# EAGLE board Flipper WiFi Dev Board v16 (EAGLE 9.7.0)
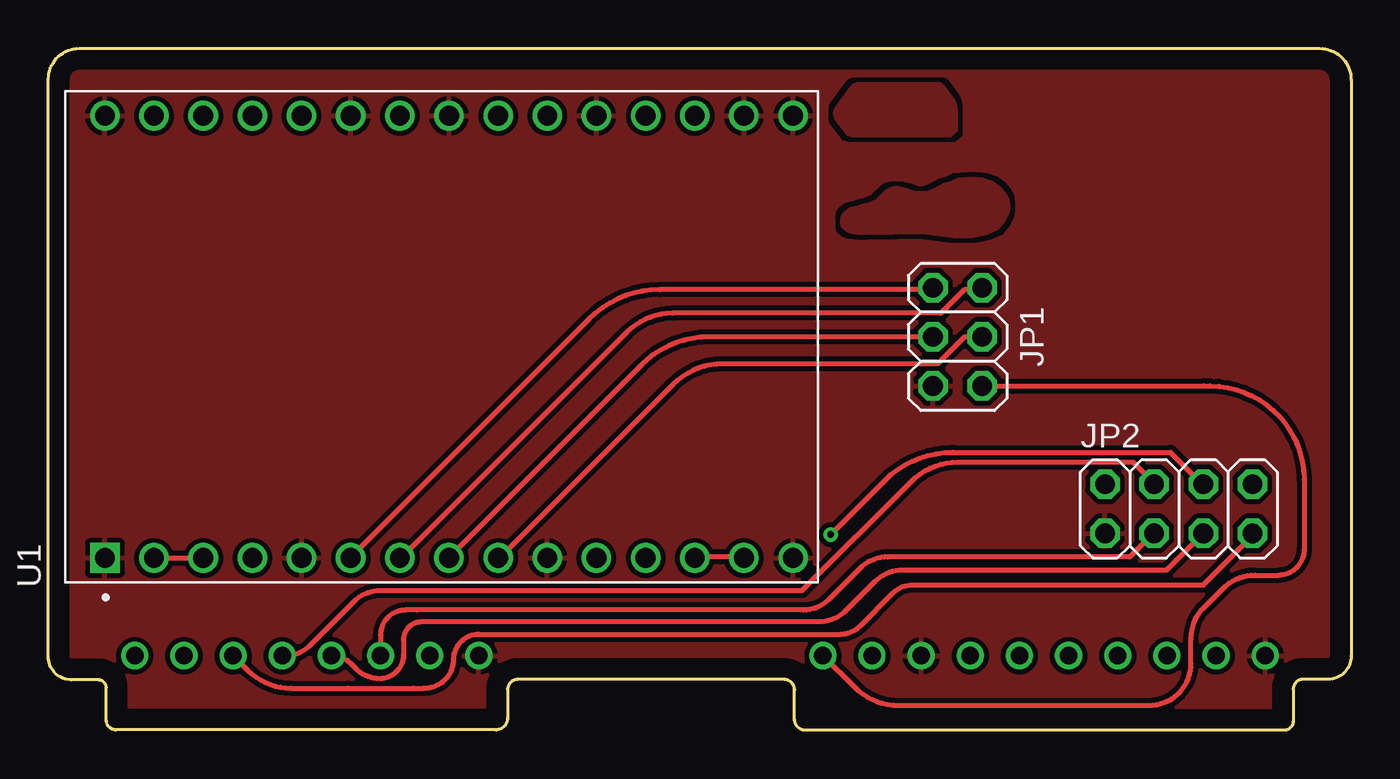
[diagram p0: board, top side]
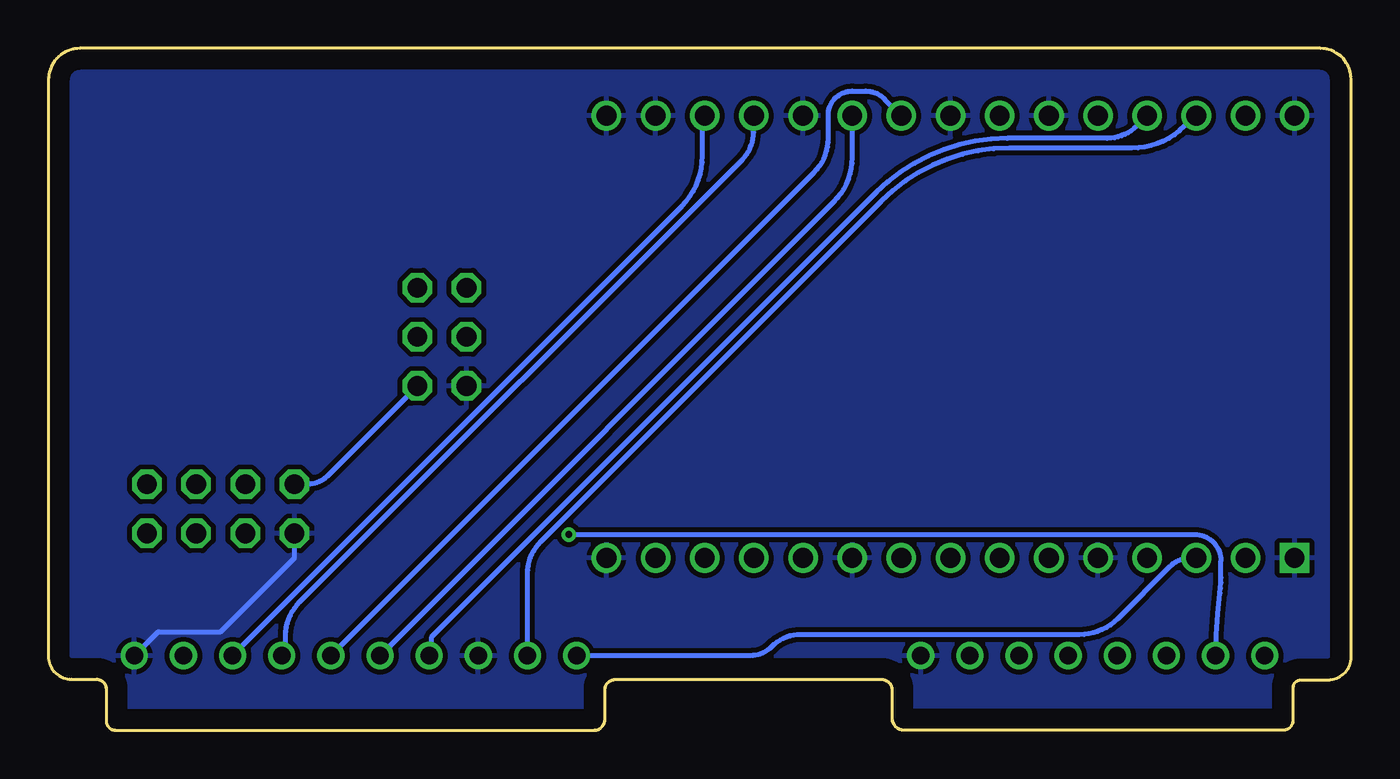
[diagram p1: board, bottom side, seen from below]

Size 67.32 x 35.25 mm. Coordinates in mm from the lower left corner, seen from the top.
Outline: 3.48,0.02 arc-90 3,0.51 3,2.19 arc90 2.58,2.61 1.19,2.61 arc-90 0,3.79 0,33.66 arc-90 1.59,35.25 65.69,35.25 arc-90 67.32,33.62 67.32,3.83 arc-90 66.13,2.64 64.84,2.64 arc90 64.33,2.13 64.33,0.48 arc-90 63.85,0 39.12,0 arc-90 38.56,0.56 38.56,2.09 arc90 38.03,2.63 24.25,2.63 arc90 23.73,2.1 23.73,0.63 arc-90 23.12,0.02 3.48,0.02
Copper layers (1*16): Top 0.035mm / dielectric 1.5mm / Bottom 0.035mm
Design rules "Fusion Electronics Design Rules": minimum track width 6mil, minimum drill 0.35mm, track to track 10mil, track to pad 10mil, pad to pad 10mil, via to via 10mil, smd to smd 10mil, copper to edge 40mil, drill to drill 6mil, minimum pad ring 10mil, minimum via ring 8mil, stop-mask expansion 4mil, vias tented up to drill 0mil, thermal gap 10mil

## Footprints (pad centres in the part's own frame; a part is rotated, then mirrored left to right if it is on the bottom)
2X03 = drill 1.016 octagon: 1 -2.54,-1.27; 2 -2.54,1.27; 3 0,-1.27; 4 0,1.27; 5 2.54,-1.27; 6 2.54,1.27
2X04 = drill 1.016 octagon: 1 -3.81,-1.27; 2 -3.81,1.27; 3 -1.27,-1.27; 4 -1.27,1.27; 5 1.27,-1.27; 6 1.27,1.27; 7 3.81,-1.27; 8 3.81,1.27
XCVR_ESP32-C3-DEVKITC-02 = drill 1.02 square: 1 -11.43,17.392 | drill 1.02: 2 -11.43,14.852; 3 -11.43,12.312; 4 -11.43,9.772; 5 -11.43,7.232; 6 -11.43,4.692; 7 -11.43,2.152; 8 -11.43,-0.388; 9 -11.43,-2.928; 10 -11.43,-5.468; 11 -11.43,-8.008; 12 -11.43,-10.548; 13 -11.43,-13.088; 14 -11.43,-15.628; 15 -11.43,-18.168; 16 11.43,-18.168; 17 11.43,-15.628; 18 11.43,-13.088; 19 11.43,-10.548; 20 11.43,-8.008; 21 11.43,-5.468; 22 11.43,-2.928; 23 11.43,-0.388; 24 11.43,2.152; 25 11.43,4.692; 26 11.43,7.232; 27 11.43,9.772; 28 11.43,12.312; 29 11.43,14.852; 30 11.43,17.392
FLIPPER = drill 0.9: 1W 60.35,3.84; 3V3 40.03,3.84; 5V 4.47,3.84; DTR 19.71,3.84; GND@1 22.25,3.84; GND@2 45.11,3.84; GND@3 62.89,3.84; IO1 42.57,3.84; IO2 47.65,3.84; IO10 14.63,3.84; IO11 7.01,3.84; IO12 12.09,3.84; IO13 9.55,3.84; IO17 57.81,3.84; IO18 55.27,3.84; RTS 17.17,3.84; RXD0 50.19,3.84; TXD0 52.73,3.84

## Placement (x,y rotation side)
JP1  PINHD-2X3  [2X03]  46.98,20.34 270 top
JP2  PINHD-2X4  [2X04]  58.41,11.45 0 top
U1  ESP32-C3-DEVKITC-02  [XCVR_ESP32-C3-DEVKITC-02]  20.31,20.34 90 top
U$1  FLIPPER_DEVBOARD  [FLIPPER]  -0.01,0.02 0 top

## Library data of the parts
JP1 = Connector; CATEGORY: Headers; DESCRIPTION: Header, Straight, 2x3 Position; MANUFACTURER: Generic; MPN: Generic; OPERATING_TEMPERATURE: Generic; PART_STATUS: Active; PITCH: 0.100" (2.54mm); ROHS_COMPLIANCE: Generic; SERIES: Generic; SUB-CATEGORY: Headers, Male Pins; TYPE: Board to Board or Cable, Unshrouded, Through Hole, Straight
JP2 = Connector; CATEGORY: Headers; DESCRIPTION: Header, Straight, 2x4 Position; MANUFACTURER: Generic; MPN: Generic; OPERATING_TEMPERATURE: Generic; PART_STATUS: Active; PITCH: 0.100" (2.54mm); ROHS_COMPLIANCE: Generic; SERIES: Generic; SUB-CATEGORY: Headers, Male Pins; TYPE: Board to Board or Cable, Unshrouded, Through Hole, Straight
U1 = ESP32-C3-DEVKITC-02; AVAILABILITY: In Stock; CHECK_PRICES: https://www.snapeda.com/parts/ESP32-C3-DevKitC-02/Espressif+Systems/view-part/?ref=eda; DESCRIPTION: Development Boards & Kits - Wireless (Engineering Samples) ESP32-C3 General-Purpose Development Board, embeds ESP32-C3-WROOM-02, 4 MB Flash, with Pin Header; MF: Espressif Systems; MP: ESP32-C3-DevKitC-02; PACKAGE: None; PRICE: None; PURCHASE-URL: https://www.snapeda.com/api/url_track_click_mouser/?unipart_id=5812307&manufacturer=Espressif Systems&part_name=ESP32-C3-DevKitC-02&search_term=esp32-c3-devkit; SNAPEDA_LINK: https://www.snapeda.com/parts/ESP32-C3-DevKitC-02/Espressif+Systems/view-part/?ref=snap
U$1 = Flipper_DevBoard

## Nets
5V: U1.13 U1.14
+3.3V: JP1.6 JP2.2 U1.2 U1.3 U$1.3V3
GND: JP1.5 JP2.1 U1.1 U1.5 U1.10 U1.15 U1.16 U1.17 U1.20 U1.23 U1.25 U1.30 U$1.GND@1 U$1.GND@2 U$1.GND@3
N$1: U1.21 U$1.RXD0
N$2: U1.22 U$1.TXD0
N$3: U1.28 U$1.IO1
N$4: U1.27 U$1.IO2
N$5: U1.19 U$1.IO18
N$6: U1.18 U$1.IO17
N$10: JP2.3 U$1.RTS
N$11: JP2.4 U$1.IO12
N$12: JP2.5 U$1.IO10
N$13: JP2.6 U$1.IO11
N$14: JP2.7 U$1.IO13
TCK: JP1.3 U1.8
TDI: JP1.2 U1.7
TDO: JP1.4 U1.9
TMS: JP1.1 U1.6

## Tracks (layer width: path | path; a pad name or v marks a point on that pad's centre or on a via)
5V
  Top 0.254: U1.13 33.52,8.96 35.76,8.96 U1.14
+3.3V
  Top 0.254: U$1.3V3 41.64,2.24 arc45 43.94,1.29 56.88,1.29 arc90 59.05,3.46 59.05,4.72 arc-45 59.73,6.36 60.7,7.34 arc-45 62.35,8.02 63.56,8.02 arc90 64.89,9.35 64.89,12.95 arc90 60.04,17.8 59.68,17.8 JP1.6 | U1.2 U1.3
  Bottom 0.254: U1.3 8.26,8.91 arc-45 9.39,8.44 12.07,5.76 arc45 14.04,4.94 28.43,4.94 arc-45 29.96,4.31 arc45 31.05,3.86 U$1.3V3 | JP1.6 52.92,13.13 arc45 53.92,12.72 JP2.2
BOG
  pour Top: 46.79,25.46 47.75,25.46 48.43,25.62 49.07,25.88 49.49,26.36 49.65,26.73 49.7,27.05 49.65,27.42 49.49,27.74 49.23,28.05 48.81,28.37 48.28,28.53 47.75,28.58 47.01,28.53 46.64,28.37 46.64,28.37 46.63,28.37 46.63,28.37 46.63,28.37 46.26,28.26 45.79,28 45.79,28 45.79,28 45.79,28 45.79,28 45.52,27.89 45.42,27.84 45.42,27.84 45.42,27.84 45.42,27.84 45.41,27.84 44.73,27.84 44.73,27.84 44.73,27.84 44.72,27.84 44.72,27.84 44.62,27.89 44.35,28 43.93,28.1 43.72,28.1 43.51,28.05 43.3,27.95 42.77,27.42 42.77,27.42 42.77,27.42 42.77,27.42 42.77,27.42 42.61,27.36 42.34,27.26 42.34,27.26 42.34,27.26 42.34,27.26 42.34,27.26 42.08,27.2 41.81,27.1 41.81,27.1 41.81,27.1 41.81,27.1 41.81,27.1 41.55,27.04 41.39,26.99 41.12,26.78 40.97,26.57 40.91,26.31 40.97,26.04 41.23,25.78 41.55,25.67 42.08,25.62 45.2,25.67 45.2,25.67 45.2,25.67 45.2,25.67 45.2,25.67
FLIPPER
  pour Top (no thermals): 41.54,30.69 46.62,30.69 46.97,30.99 46.97,32.03 46.96,32.18 46.92,32.32 46.86,32.46 46.79,32.58 46.24,33.33 46.19,33.39 46.12,33.44 46.04,33.47 45.96,33.48 41.9,33.48 41.79,33.47 41.69,33.44 41.6,33.39 41.52,33.33 41.45,33.25 40.69,32.22 40.62,32.11 40.59,32 40.57,31.87 40.59,31.75 40.63,31.64 40.7,31.53 41.24,30.84 41.3,30.77 41.37,30.73 41.45,30.7
GND
  Bottom 0.254: U$1.GND@3 61.64,5.1 58.41,5.1 54.6,8.91 JP2.1
  pour Top (rank 6): -1.15,0.15 67.18,0.15 67.18,35.45 -1.15,35.45
  pour Bottom (rank 6): -1.15,0.15 67.18,0.15 67.18,35.45 -1.15,35.45
N$1
  Bottom 0.254: U$1.RXD0 26.72,27.32 arc-45 25.78,29.59 U1.21
N$2
  Bottom 0.254: U$1.TXD0 27.75,28.83 arc-45 27.02,30.59 27.02,31.81 arc90 25.79,33.04 25.08,33.04 arc45 24.11,32.63 U1.22
N$3
  Bottom 0.254: U1.28 8.12,31.72 8.62,31.22 arc45 11.34,30.09 17.66,30.09 arc-45 24.27,27.35 41.86,9.76 arc-45 42.56,8.07 U$1.IO1
N$4
  Bottom 0.254: U$1.IO2 47.54,3.88 47.54,4.8 24.55,27.79 arc45 17.77,30.6 12.6,30.6 arc-45 11.08,31.23 U1.27
N$5
  Bottom 0.254: U$1.IO18 55.06,3.88 55.06,4.87 arc45 54.32,6.65 31.46,29.51 arc-45 30.88,30.92 30.88,31.72 U1.19
N$6
  Bottom 0.254: U1.18 33.52,31.65 33.52,29.67 arc45 34.59,27.1 57.8,3.89 U$1.IO17
N$10
  Top 0.254: JP2.3 57.09,10.18 55.87,8.96 43.38,8.96 arc45 41.9,8.35 40.31,6.75 arc-45 39.01,6.22 19.04,6.22 18.45,6.22 arc90 17.16,4.93 U$1.RTS
N$11
  Top 0.254: U$1.IO12 12.19,3.88 12.33,3.88 arc45 13.47,4.35 15.77,6.65 arc-45 17.18,7.23 38.95,7.23 44.56,12.85 arc-45 47.02,13.86 56.05,13.86 57.09,12.82 JP2.4
N$12
  Top 0.254: JP2.5 57.78,8.27 44.13,8.27 arc45 42.71,7.69 41.22,6.19 arc-45 39.81,5.61 19.29,5.61 arc90 18.35,4.66 18.35,3.89 arc-90 17.13,2.67 arc-45 15.87,3.19 15.61,3.45 arc45 U$1.IO10
N$13  (via drill 0.35)
  Top 0.254: JP2.6 59.53,12.82 57.98,14.37 46.73,14.37 arc45 43.23,12.92 v40.43,10.12
  Bottom 0.254: v40.43,10.12 8.09,10.12 arc90 6.72,8.76 6.72,7.89 arc7 6.78,7.09 arc-6 U$1.IO11
N$14
  Top 0.254: U$1.IO13 10.29,3.11 arc45 12.54,2.18 15.47,2.18 15.47,2.16 18.86,2.16 18.86,2.18 19.41,2.18 arc45 20.52,2.64 arc45 20.95,3.67 arc-90 22.25,4.97 40.94,4.97 arc45 41.94,5.39 43.65,7.1 arc-45 44.65,7.51 59.68,7.51 62.22,10.05 JP2.7
TCK
  Top 0.254: JP1.3 34.16,20.34 arc45 30.64,18.88 20.72,8.96 U1.8
TDI
  Top 0.254: JP1.2 48.15,22.78 47.34,22.78 46.12,21.56 32.25,21.56 arc45 29.91,20.59 18.28,8.96 U1.7
TDO
  Top 0.254: JP1.4 47.34,20.34 45.94,18.94 34.86,18.94 arc45 32.27,17.87 23.36,8.96 U1.9
TMS
  Top 0.254: JP1.1 45.71,22.78 31.59,22.78 arc45 27.95,21.27 15.64,8.96 U1.6